# Altium PCB Final_PCBDesign_HY.PcbDoc (part 1 of 2)
Units mil, origin at the board's own origin, x right, y up, seen from the top; angles counter-clockwise.
Board outline 6000 x 4000 mil, 2 copper layers (Top Layer, Bottom Layer); 11 components, 10 nets, 55 pads, 2 vias.
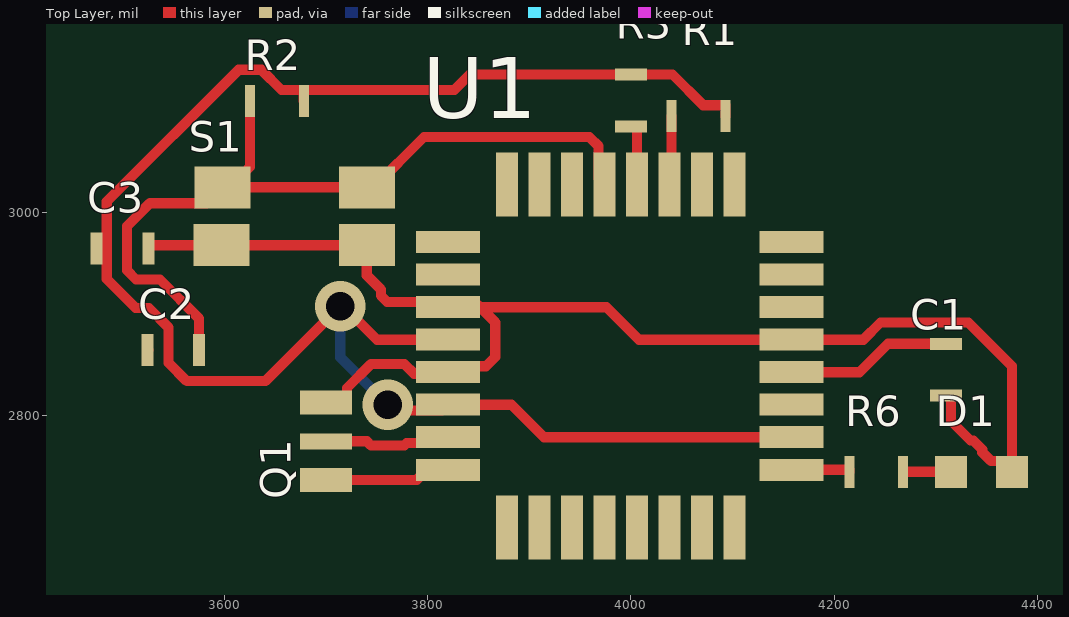
[diagram p0: Top Layer view]
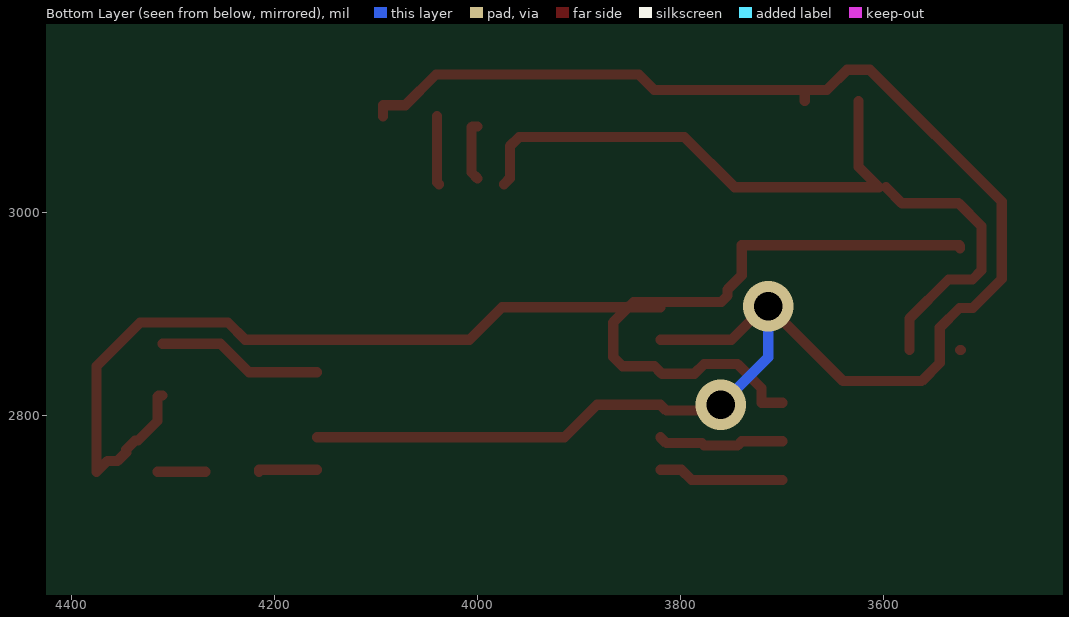
[diagram p1: Bottom Layer view, seen from below]

## Layer stack, top to bottom
Top Solder: solder mask 0.4, Solder Resist, Dk 3.5
Top Layer: signal copper 1.4
Dielectric 1: dielectric 12.6, FR-4, Dk 4.8
Bottom Layer: signal copper 1.4
Bottom Solder: solder mask 0.4, Solder Resist, Dk 3.5

## Board outline
1000,1000 7000,1000 7000,5000 1000,5000

## Design rules (kind name [scope] priority, off if disabled: settings)
Clearance [All] p1: gap=10 ignorepadtopadclearanceinfootprint=FALSE
PolygonConnect [All] p1: connectstyle=Relief reliefconductorwidth=10 reliefentries=4 polygonreliefangle="90 Angle" airgapwidth=10
RoutingVias [All] p1: holewidth=28 width=50 viastyle="Through Hole" minholewidth=28 minwidth=50 maxholewidth=28 maxwidth=50
SolderMaskExpansion [All] p1: expansion=4 istentingtop=FALSE
SupplyNets "Schematic Supply Nets_1" [InNet('GND')] p1: voltage=0.000
SupplyNets "Schematic Supply Nets" [InNet('VCC')] p2: voltage=0.000
Width [All] p1: maxlimit=10 minlimit=10 preferedwidth=10
30 further rules are at their usual default settings.

## Components (designator, comment, footprint, x,y, rotation, side; value= is the part's Value field where it differs from the comment)
C1 "0.1 uF" "C_0603 (1608 Metric)" 4347,2874 r90 top value=100nF
C2 "0.1 uF" "C_0603 (1608 Metric)" 3578,2828 r0 top value=100nF
C3 "0.1 uF" "C_0603 (1608 Metric)" 3528,2928 r0 top value=100nF
D1 "Yeşil LED" "D_0603 (1608 Metric)" 4359,2718 r0 top
Q1 "16MHZ" Q_3-SMD 3708,2837 r90 top value=15pF
R1 "10 kOhm" R_0603 4079,3097 r0 top value=10kΩ
R2 "10 kOhm" R_0603 3664,3112 r0 top value=10kΩ
R3 "4.7 kOhm" "0603 (1608 Metric)_2" 4003,3110 r90 top value=4.7kΩ
R6 "330 Ohm" "R_0603 (1608 Metric)" 4245,2747 r0 top value=47µF
S1 "SMD" EVQ-P7L01P 3644,2987 r0 top
U1 "ATMEGA328P-AU" U_32-TQFP 3958,2870 r0 top

## Footprints (in the part's own frame and the unit in brackets; to place one, negate y for a bottom-side part, rotate by r counter-clockwise, add the part's x,y. Pads: shape width x height; smd on the part's side, far side on the other; paste and mask are expansions set on the pad)
"0603 (1608 Metric)_2" [mm]
  rect 0.3x0.8 smd: 0(-0.635,0.076) 1(0.66,0.076)
"C_0603 (1608 Metric)" [mil]
  rect 11.81x31.5 smd: 0(-54,37) 1(-3,37)
"D_0603 (1608 Metric)" [mil]
  rect 31.5x31.5 smd: 0(-44,27) 1(16,27)
EVQ-P7L01P [mil]
  rect 55.12x41.34 smd: 0(-46,38) 1(96,38) 2(-47,-19) 3(96,-19)
Q_3-SMD [mm]
  rect 0.6x1.3 smd: 1(-2.54,0.203) 3(-0.61,0.203)
  rect 0.4x1.3 smd: 2(-1.575,0.203)
R_0603 [mil]
  rect 9.84x31.5 smd: 0(-39,-2) 1(14,-2)
"R_0603 (1608 Metric)" [mil]
  rect 9.84x31.5 smd: 0(-30,-2) 1(23,-2)
U_32-TQFP [mm]
  rect 1.6x0.55 smd: 1(-3.505,2.565) 2(-3.505,1.753) 3(-3.505,0.94) 4(-3.505,0.127) 5(-3.505,-0.686) 6(-3.505,-1.499) 7(-3.505,-2.311) 8(-3.505,-3.124) 17(5.08,-3.124) 18(5.08,-2.311) 19(5.08,-1.499) 20(5.08,-0.686) 21(5.08,0.127) 22(5.08,0.94) 23(5.08,1.753) 24(5.08,2.565)
  rect 0.55x1.6 smd: 9(-2.032,-4.572) 10(-1.219,-4.572) 11(-0.406,-4.572) 12(0.406,-4.572) 13(1.219,-4.572) 14(2.032,-4.572) 15(2.845,-4.572) 16(3.658,-4.572) 25(3.658,4.013) 26(2.845,4.013) 27(2.032,4.013) 28(1.219,4.013) 29(0.406,4.013) 30(-0.406,4.013) 31(-1.219,4.013) 32(-2.032,4.013)

## Part data
C1 C2 C3: library part CL10B104KB8NNNC, "Multi Layer Ceramic Capacitor (MLCC) / Cap Ceramic 0.1uF 50V X7R 10% Pad SMD 0603 125°C T/R", Case Code (Metric)=1608, Case Code (Imperial)=0603, Dielectric=X7R, Dielectric Material=Ceramic, Manufacturer="Samsung Electro-Mechanics", Max Operating Temperature=125°C, Min Operating Temperature=-55°C, Tolerance=10%, Voltage=50V, Case/Package=0603, Category="Ceramic Capacitors", China RoHS=Compliant, ComponentLink1Description=https://datasheet.octopart.com:443/CL10B104KB8NNNC-Samsung-datasheet-165517828.pdf?src-supplier=Upverter, ComponentLink1URL=https://datasheet.octopart.com:443/CL10B104KB8NNNC-Samsung-datasheet-165517828.pdf?src-supplier=Upverter, ComponentLink2Description=https://datasheet.octopart.com:443/CL10B104KB8NNNC-Samsung-Electro-Mechanics-datasheet-116890969.pdf?src-supplier=Upverter, ComponentLink2URL=https://datasheet.octopart.com:443/CL10B104KB8NNNC-Samsung-Electro-Mechanics-datasheet-116890969.pdf?src-supplier=Upverter, ComponentLink3Description=https://datasheet.octopart.com:443/CL10B104KB8NNNC-Samsung-Electro-Mechanics-datasheet-81461840.pdf?src-supplier=Upverter, ComponentLink3URL=https://datasheet.octopart.com:443/CL10B104KB8NNNC-Samsung-Electro-Mechanics-datasheet-81461840.pdf?src-supplier=Upverter, ComponentLink4Description=https://datasheet.octopart.com:443/CL10B104KB8NNNC-Samsung-Electro-Mechanics-datasheet-181551448.pdf?src-supplier=Newark, ComponentLink4URL=https://datasheet.octopart.com:443/CL10B104KB8NNNC-Samsung-Electro-Mechanics-datasheet-181551448.pdf?src-supplier=Newark, ComponentLink5Description=https://datasheet.octopart.com:443/CL10B104KB8NNNC-Samsung-Electro-Mechanics-datasheet-181551449.pdf?src-supplier=Newark, ComponentLink5URL=https://datasheet.octopart.com:443/CL10B104KB8NNNC-Samsung-Electro-Mechanics-datasheet-181551449.pdf?src-supplier=Newark, ComponentLink6Description=https://datasheet.octopart.com/CL10B104KB8NNNC-Samsung-Electro-Mechanics-datasheet-8324245.pdf, ComponentLink6URL=https://datasheet.octopart.com/CL10B104KB8NNNC-Samsung-Electro-Mechanics-datasheet-8324245.pdf, ComponentLink7Description=https://datasheet.octopart.com/CL10B104KB8NNNC-Samsung-Electro-Mechanics-datasheet-97040617.pdf, ComponentLink7URL=https://datasheet.octopart.com/CL10B104KB8NNNC-Samsung-Electro-Mechanics-datasheet-97040617.pdf, ComponentLink8Description=https://datasheet.octopart.com:443/CL10B104KB8NNNC-Samsung-Electro-Mechanics-datasheet-136482302.pdf?src-supplier=Samsung+SCT, ComponentLink8URL=https://datasheet.octopart.com:443/CL10B104KB8NNNC-Samsung-Electro-Mechanics-datasheet-136482302.pdf?src-supplier=Samsung+SCT, ComponentLink9Description=https://datasheet.octopart.com:443/CL10B104KB8NNNC-Samsung-datasheet-42770373.pdf?src-supplier=Future+Electronics, ComponentLink9URL=https://datasheet.octopart.com:443/CL10B104KB8NNNC-Samsung-datasheet-42770373.pdf?src-supplier=Future+Electronics, ComponentLink10Description=https://datasheet.octopart.com:443/CL10B104KB8NNNC-Samsung-datasheet-26589154.pdf?src-supplier=Future+Electronics, ComponentLink10URL=https://datasheet.octopart.com:443/CL10B104KB8NNNC-Samsung-datasheet-26589154.pdf?src-supplier=Future+Electronics, ComponentLink11Description=https://datasheet.octopart.com:443/CL10B104KB8NNNC-Samsung-Electro-Mechanics-datasheet-149136784.pdf?src-supplier=Future+Electronics, ComponentLink11URL=https://datasheet.octopart.com:443/CL10B104KB8NNNC-Samsung-Electro-Mechanics-datasheet-149136784.pdf?src-supplier=Future+Electronics, ComponentLink12Description=https://datasheet.octopart.com:443/CL10B104KB8NNNC-Samsung-datasheet-22147433.pdf?src-supplier=TME, ComponentLink12URL=https://datasheet.octopart.com:443/CL10B104KB8NNNC-Samsung-datasheet-22147433.pdf?src-supplier=TME, ComponentLink13Description=https://datasheet.octopart.com:443/CL10B104KB8NNNC-Samsung-Electro-Mechanics-datasheet-11837008.pdf?src-supplier=Arrow+Electronics, ComponentLink13URL=https://datasheet.octopart.com:443/CL10B104KB8NNNC-Samsung-Electro-Mechanics-datasheet-11837008.pdf?src-supplier=Arrow+Electronics, Contact Plating=Tin, Depth=800µm, Height=900µm, Lead Free="Lead Free", Length=1.6mm, Lifecycle Status=Production, Manufacturer Part Number=CL10B104KB8NNNC, Material=Ceramic, Mounting Technology="Surface Mount", Number of Terminals=2, Pricing="8000=0,0023, 20000=0,0022, 80000=0,0021, 200000=0,0021, 500000=0,002 (USD)", Radiation Hardening=No, REACH SVHC=Yes, RoHS=Compliant, Schedule B="8532240020, 8532240020|8532240020|8532240020|8532240020|8532240020|8532240020|8532240020|8532240020|8532240020|8532240020, 8532240020|8532240020|8532240020|8532240020|8532240020|8532240020|8532240020|8532240020|8532240020|8532240020|8532240020, 8532240020|8532240020|8532240020|8532240020|8532240020|8532240020|8532240020|8532240020|8532240020|8532240020|8532240020|8532240020", Stock=68984000, Supplier="Future Electronics", Supplier Part Number=CL10B104KB8NNNC, Thickness=889µm, Voltage Rating=50V, Voltage Rating (DC)=50V, Width=800µm
D1: library part LTST-C190KGKT, "LED yellow green 0603 wavelength 567.5nm~576.5nm light intensity 18mcd~71mcd Front Mounting", Case Code (Metric)=1608, Case Code (Imperial)=0603, Color=Green, Forward Current=30mA, Forward Voltage=2.4V, Lens Color="Clear, Colorless", Manufacturer="Diodes Inc.", Max Operating Temperature=85°C, Min Operating Temperature=-30°C, Power Dissipation=75mW, Reverse Voltage=5V, Test Current=20mA, Case/Package=0603, Category=LEDs, China RoHS=Compliant, ComponentLink1Description=https://datasheet.octopart.com:443/LTST-C190KGKT-Lite-On-datasheet-86397316.pdf?src-supplier=ODG+(Origin+Data+Global), ComponentLink1URL=https://datasheet.octopart.com:443/LTST-C190KGKT-Lite-On-datasheet-86397316.pdf?src-supplier=ODG+(Origin+Data+Global), ComponentLink2Description=https://datasheet.octopart.com:443/LTST-C190KGKT-Lite-On-datasheet-180605179.pdf?src-supplier=IHS, ComponentLink2URL=https://datasheet.octopart.com:443/LTST-C190KGKT-Lite-On-datasheet-180605179.pdf?src-supplier=IHS, ComponentLink3Description=https://datasheet.octopart.com:443/LTST-C190KGKT-Lite-On-datasheet-13693967.pdf?src-supplier=Factory+Futures, ComponentLink3URL=https://datasheet.octopart.com:443/LTST-C190KGKT-Lite-On-datasheet-13693967.pdf?src-supplier=Factory+Futures, ComponentLink4Description=https://datasheet.octopart.com:443/LTST-C190KGKT-Lite-On-datasheet-165573809.pdf?src-supplier=TME, ComponentLink4URL=https://datasheet.octopart.com:443/LTST-C190KGKT-Lite-On-datasheet-165573809.pdf?src-supplier=TME, ComponentLink5Description=https://datasheet.octopart.com:443/LTST-C190KGKT-Lite-On-datasheet-165573808.pdf?src-supplier=TME, ComponentLink5URL=https://datasheet.octopart.com:443/LTST-C190KGKT-Lite-On-datasheet-165573808.pdf?src-supplier=TME, ComponentLink6Description=https://datasheet.octopart.com:443/LTST-C190KGKT-Lite-On-datasheet-43775815.pdf?src-supplier=TME, ComponentLink6URL=https://datasheet.octopart.com:443/LTST-C190KGKT-Lite-On-datasheet-43775815.pdf?src-supplier=TME, ComponentLink7Description=https://datasheet.octopart.com:443/LTST-C190KGKT-Lite-On-datasheet-32046999.pdf?src-supplier=Future+Electronics, ComponentLink7URL=https://datasheet.octopart.com:443/LTST-C190KGKT-Lite-On-datasheet-32046999.pdf?src-supplier=Future+Electronics, ComponentLink8Description=https://datasheet.octopart.com:443/LTST-C190KGKT-Lite-On-datasheet-8326678.pdf?src-supplier=Future+Electronics, ComponentLink8URL=https://datasheet.octopart.com:443/LTST-C190KGKT-Lite-On-datasheet-8326678.pdf?src-supplier=Future+Electronics, ComponentLink9Description=https://datasheet.octopart.com:443/LTST-C190KGKT-Lite-On-datasheet-78838574.pdf?src-supplier=Future+Electronics, ComponentLink9URL=https://datasheet.octopart.com:443/LTST-C190KGKT-Lite-On-datasheet-78838574.pdf?src-supplier=Future+Electronics, ComponentLink10Description=https://datasheet.octopart.com:443/LTST-C190KGKT-Lite-On-datasheet-158288.pdf?src-supplier=Mouser, ComponentLink10URL=https://datasheet.octopart.com:443/LTST-C190KGKT-Lite-On-datasheet-158288.pdf?src-supplier=Mouser, ComponentLink11Description=https://datasheet.octopart.com:443/LTST-C190KGKT-Lite-On-datasheet-49281.pdf?src-supplier=DigiKey, ComponentLink11URL=https://datasheet.octopart.com:443/LTST-C190KGKT-Lite-On-datasheet-49281.pdf?src-supplier=DigiKey, ComponentLink12Description=https://datasheet.octopart.com:443/LTST-C190KGKT-Lite-On-datasheet-14174998.pdf?src-supplier=iiiC, ComponentLink12URL=https://datasheet.octopart.com:443/LTST-C190KGKT-Lite-On-datasheet-14174998.pdf?src-supplier=iiiC, Depth=800µm, Dominant Wavelength=571nm, Height=800µm, Lead Free="Lead Free", Length=1.6mm, Lens Style=Clear, Lens Transparency=Clear, Lifecycle Status=Production, Luminous Intensity=35mcd, Manufacturer Part Number=LTST-C190KGKT, Mounting Technology="Surface Mount", Number of Circuits=1, Number of Elements=1, Number of LEDs=1, Number of Terminals=2, Peak Wavelength=574nm, Pins=2, Power Rating=75mW, Pricing="4000=0,0157, 8000=0,0153, 12000=0,0151, 20000=0,0148, 28000=0,0146, 40000=0,0144 (USD)", Radiation Hardening=No, REACH SVHC=Yes, RoHS=Compliant, Schedule B="8541402000, 8541402000|8541402000|8541402000|8541402000|8541402000|8541402000|8541402000|8541402000|8541402000|8541402000|8541402000|8541402000|8541402000|8541402000|8541402000|8541402000|8541402000|8541402000|8541402000|8541402000|8541402000|8541402000|8541402000|85", Shape=Rectangular, Stock=508000, Supplier="Arrow Electronics", Supplier Part Number=LTST-C190KGKT, Terminal Pitch=1.5mm, Viewing Angle=130°, Wavelength=574nm, Width=800µm, Illumination Color=Green
Q1: library part CSTCE16M0V53-R0, "Ceramic Resonator 16MHz ±0.5% (Tol) ±0.3% (Stability) 15pF 40Ohm 3-Pin CSMD T/R", Case/Package=SMD/SMT, Frequency=16MHz, Frequency Stability=5000ppm, Frequency Tolerance=0.5%, Load Capacitance=15pF, Manufacturer=Murata, Max Operating Temperature=85°C, Min Operating Temperature=-45°C, Category=Capacitors, ComponentLink1Description=https://datasheet.octopart.com:443/CSTCE16M0V53-R0-Murata-datasheet-180807744.pdf?src-supplier=IHS, ComponentLink1URL=https://datasheet.octopart.com:443/CSTCE16M0V53-R0-Murata-datasheet-180807744.pdf?src-supplier=IHS, ComponentLink2Description=https://datasheet.octopart.com:443/CSTCE16M0V53-R0-Murata-datasheet-13544362.pdf?src-supplier=Upverter, ComponentLink2URL=https://datasheet.octopart.com:443/CSTCE16M0V53-R0-Murata-datasheet-13544362.pdf?src-supplier=Upverter, ComponentLink3Description=https://datasheet.octopart.com:443/CSTCE16M0V53-R0-Murata-datasheet-12524911.pdf?src-supplier=Upverter, ComponentLink3URL=https://datasheet.octopart.com:443/CSTCE16M0V53-R0-Murata-datasheet-12524911.pdf?src-supplier=Upverter, ComponentLink4Description=https://datasheet.octopart.com:443/CSTCE16M0V53-R0-Murata-datasheet-62316101.pdf?src-supplier=Upverter, ComponentLink4URL=https://datasheet.octopart.com:443/CSTCE16M0V53-R0-Murata-datasheet-62316101.pdf?src-supplier=Upverter, ComponentLink5Description=https://datasheet.octopart.com:443/CSTCE16M0V53-R0-Murata-datasheet-141913778.pdf?src-supplier=Upverter, ComponentLink5URL=https://datasheet.octopart.com:443/CSTCE16M0V53-R0-Murata-datasheet-141913778.pdf?src-supplier=Upverter, ComponentLink6Description=https://datasheet.octopart.com:443/CSTCE16M0V53-R0-Murata-datasheet-5335552.pdf?src-supplier=Newark, ComponentLink6URL=https://datasheet.octopart.com:443/CSTCE16M0V53-R0-Murata-datasheet-5335552.pdf?src-supplier=Newark, ComponentLink7Description=https://datasheet.octopart.com:443/CSTCE16M0V53-R0-Murata-datasheet-162930.pdf?src-supplier=Future+Electronics, ComponentLink7URL=https://datasheet.octopart.com:443/CSTCE16M0V53-R0-Murata-datasheet-162930.pdf?src-supplier=Future+Electronics, ComponentLink8Description=https://datasheet.octopart.com:443/CSTCE16M0V53-R0-Murata-datasheet-10541638.pdf?src-supplier=Future+Electronics, ComponentLink8URL=https://datasheet.octopart.com:443/CSTCE16M0V53-R0-Murata-datasheet-10541638.pdf?src-supplier=Future+Electronics, ComponentLink9Description=https://datasheet.octopart.com:443/CSTCE16M0V53-R0-Murata-datasheet-141258340.pdf?src-supplier=Ciiva, ComponentLink9URL=https://datasheet.octopart.com:443/CSTCE16M0V53-R0-Murata-datasheet-141258340.pdf?src-supplier=Ciiva, ComponentLink10Description=https://datasheet.octopart.com:443/CSTCE16M0V53-R0-Murata-datasheet-138707999.pdf?src-supplier=Ciiva, ComponentLink10URL=https://datasheet.octopart.com:443/CSTCE16M0V53-R0-Murata-datasheet-138707999.pdf?src-supplier=Ciiva, ComponentLink11Description=https://datasheet.octopart.com:443/CSTCE16M0V53-R0-Murata-datasheet-83054217.pdf?src-supplier=TME, ComponentLink11URL=https://datasheet.octopart.com:443/CSTCE16M0V53-R0-Murata-datasheet-83054217.pdf?src-supplier=TME, ComponentLink12Description=https://datasheet.octopart.com/CSTCE16M0V53-R0-Murata-datasheet-86813623.pdf, ComponentLink12URL=https://datasheet.octopart.com/CSTCE16M0V53-R0-Murata-datasheet-86813623.pdf, ComponentLink13Description=https://datasheet.octopart.com:443/CSTCE16M0V53-R0-Murata-datasheet-13536434.pdf?src-supplier=Factory+Futures, ComponentLink13URL=https://datasheet.octopart.com:443/CSTCE16M0V53-R0-Murata-datasheet-13536434.pdf?src-supplier=Factory+Futures, ComponentLink14Description=https://datasheet.octopart.com:443/CSTCE16M0V53-R0-Murata-datasheet-11793933.pdf?src-supplier=Arrow+Electronics, ComponentLink14URL=https://datasheet.octopart.com:443/CSTCE16M0V53-R0-Murata-datasheet-11793933.pdf?src-supplier=Arrow+Electronics, ComponentLink15Description=https://datasheet.octopart.com:443/CSTCE16M0V53-R0-Murata-datasheet-15574.pdf?src-supplier=element14+APAC, ComponentLink15URL=https://datasheet.octopart.com:443/CSTCE16M0V53-R0-Murata-datasheet-15574.pdf?src-supplier=element14+APAC, ComponentLink16Description=https://datasheet.octopart.com:443/CSTCE16M0V53-R0-Murata-datasheet-119166.pdf?src-supplier=DigiKey, ComponentLink16URL=https://datasheet.octopart.com:443/CSTCE16M0V53-R0-Murata-datasheet-119166.pdf?src-supplier=DigiKey, ComponentLink17Description=http://sigma.octopart.com:80/reach_statement/Murata-company-16.pdf?src-supplier=Compliance+Statements, ComponentLink17URL=http://sigma.octopart.com:80/reach_statement/Murata-company-16.pdf?src-supplier=Compliance+Statements, Composition=Ceramic, Contact Plating=Gold, Height=990.6µm, Lead Free="Lead Free", Length=3.2004mm, Lifecycle Status=Obsolete, Manufacturer Part Number=CSTCE16M0V53-R0, Pins=3, Pricing="5=0,458, 50=0,304, 250=0,277, 500=0,227, 1500=0,212, 3000=0,197, 15000=0,191 (EUR)", REACH SVHC=Yes, RoHS=Compliant, Self Resonant Frequency=16MHz, Supplier=Farnell, Supplier Part Number=CSTCE16M0V53-R0, Termination=SMD/SMT, Tolerance=0.5%, Width=1.2954mm, Impedance=40Ω
R1 R2: library part RC0603FR-0710KL, "100mW Thick Film Resistors ±100ppm/℃ ±1% 10kΩ 0603 Chip Resistor - Surface Mount ROHS", Case Code (Metric)=0603, Manufacturer="Yageo Group", Max Operating Temperature=155°C, Min Operating Temperature=-55°C, Power Rating=100mW, Temperature Coefficient=100ppm/°C, Tolerance=1%, Voltage Rating=75V, Voltage Rating (DC)=50V, Case Code (Imperial)=0603, Case/Package=0603, Category="Chip SMD Resistors", China RoHS=Non-Compliant, ComponentLink1Description=https://datasheet.octopart.com:443/RC0603FR-0710KL-Yageo-datasheet-175887523.pdf?src-supplier=IHS, ComponentLink1URL=https://datasheet.octopart.com:443/RC0603FR-0710KL-Yageo-datasheet-175887523.pdf?src-supplier=IHS, ComponentLink2Description=https://datasheet.octopart.com:443/RC0603FR-0710KL-Yageo-datasheet-103092701.pdf?src-supplier=Upverter, ComponentLink2URL=https://datasheet.octopart.com:443/RC0603FR-0710KL-Yageo-datasheet-103092701.pdf?src-supplier=Upverter, ComponentLink3Description=https://datasheet.octopart.com:443/RC0603FR-0710KL-Yageo-datasheet-98239111.pdf?src-supplier=Upverter, ComponentLink3URL=https://datasheet.octopart.com:443/RC0603FR-0710KL-Yageo-datasheet-98239111.pdf?src-supplier=Upverter, ComponentLink4Description=https://datasheet.octopart.com:443/RC0603FR-0710KL-Yageo-datasheet-141265859.pdf?src-supplier=Upverter, ComponentLink4URL=https://datasheet.octopart.com:443/RC0603FR-0710KL-Yageo-datasheet-141265859.pdf?src-supplier=Upverter, ComponentLink5Description=https://sigma.octopart.com:443/138820526/technical_drawing/Yageo-RC0603FR-0710KL.pdf?src-supplier=Upverter, ComponentLink5URL=https://sigma.octopart.com:443/138820526/technical_drawing/Yageo-RC0603FR-0710KL.pdf?src-supplier=Upverter, ComponentLink6Description=https://datasheet.octopart.com:443/RC0603FR-0710KL-Yageo-datasheet-8328172.pdf?src-supplier=Farnell, ComponentLink6URL=https://datasheet.octopart.com:443/RC0603FR-0710KL-Yageo-datasheet-8328172.pdf?src-supplier=Farnell, ComponentLink7Description=https://datasheet.octopart.com:443/RC0603FR-0710KL-Yageo-datasheet-13691069.pdf?src-supplier=Farnell, ComponentLink7URL=https://datasheet.octopart.com:443/RC0603FR-0710KL-Yageo-datasheet-13691069.pdf?src-supplier=Farnell, ComponentLink8Description=https://datasheet.octopart.com:443/RC0603FR-0710KL-Yageo-datasheet-62067350.pdf?src-supplier=element14+APAC, ComponentLink8URL=https://datasheet.octopart.com:443/RC0603FR-0710KL-Yageo-datasheet-62067350.pdf?src-supplier=element14+APAC, ComponentLink9Description=https://datasheet.octopart.com:443/RC0603FR-0710KL-Yageo-datasheet-17842380.pdf?src-supplier=element14+APAC, ComponentLink9URL=https://datasheet.octopart.com:443/RC0603FR-0710KL-Yageo-datasheet-17842380.pdf?src-supplier=element14+APAC, ComponentLink10Description=https://datasheet.octopart.com:443/RC0603FR-0710KL-Yageo-datasheet-15599030.pdf?src-supplier=Future+Electronics, ComponentLink10URL=https://datasheet.octopart.com:443/RC0603FR-0710KL-Yageo-datasheet-15599030.pdf?src-supplier=Future+Electronics, ComponentLink11Description=https://datasheet.octopart.com:443/RC0603FR-0710KL-Yageo-Group-datasheet-176638170.pdf?src-supplier=Future+Electronics, ComponentLink11URL=https://datasheet.octopart.com:443/RC0603FR-0710KL-Yageo-Group-datasheet-176638170.pdf?src-supplier=Future+Electronics, ComponentLink12Description=https://datasheet.octopart.com:443/RC0603FR-0710KL-Yageo-datasheet-164759695.pdf?src-supplier=Future+Electronics, ComponentLink12URL=https://datasheet.octopart.com:443/RC0603FR-0710KL-Yageo-datasheet-164759695.pdf?src-supplier=Future+Electronics, ComponentLink13Description=https://datasheet.octopart.com:443/RC0603FR-0710KL-Yageo-datasheet-127823281.pdf?src-supplier=Future+Electronics, ComponentLink13URL=https://datasheet.octopart.com:443/RC0603FR-0710KL-Yageo-datasheet-127823281.pdf?src-supplier=Future+Electronics, ComponentLink14Description=https://datasheet.octopart.com:443/RC0603FR-0710KL-Yageo-datasheet-137700087.pdf?src-supplier=Future+Electronics, ComponentLink14URL=https://datasheet.octopart.com:443/RC0603FR-0710KL-Yageo-datasheet-137700087.pdf?src-supplier=Future+Electronics, ComponentLink15Description=https://datasheet.octopart.com:443/RC0603FR-0710KL-Yageo-datasheet-27584510.pdf?src-supplier=Future+Electronics, ComponentLink15URL=https://datasheet.octopart.com:443/RC0603FR-0710KL-Yageo-datasheet-27584510.pdf?src-supplier=Future+Electronics, ComponentLink16Description=https://datasheet.octopart.com:443/RC0603FR-0710KL-Yageo-datasheet-8324193.pdf?src-supplier=Future+Electronics, ComponentLink16URL=https://datasheet.octopart.com:443/RC0603FR-0710KL-Yageo-datasheet-8324193.pdf?src-supplier=Future+Electronics, ComponentLink17Description=https://datasheet.octopart.com:443/RC0603FR-0710KL-Yageo-datasheet-12596169.pdf?src-supplier=Newark, ComponentLink17URL=https://datasheet.octopart.com:443/RC0603FR-0710KL-Yageo-datasheet-12596169.pdf?src-supplier=Newark, ComponentLink18Description=https://datasheet.octopart.com:443/RC0603FR-0710KL-Yageo-datasheet-503470.pdf?src-supplier=Newark, ComponentLink18URL=https://datasheet.octopart.com:443/RC0603FR-0710KL-Yageo-datasheet-503470.pdf?src-supplier=Newark, ComponentLink19Description=https://datasheet.octopart.com:443/RC0603FR-0710KL-Yageo-datasheet-34211833.pdf?src-supplier=Newark, ComponentLink19URL=https://datasheet.octopart.com:443/RC0603FR-0710KL-Yageo-datasheet-34211833.pdf?src-supplier=Newark, ComponentLink20Description=https://datasheet.octopart.com:443/RC0603FR-0710KL-Yageo-datasheet-79472498.pdf?src-supplier=Megastar, ComponentLink20URL=https://datasheet.octopart.com:443/RC0603FR-0710KL-Yageo-datasheet-79472498.pdf?src-supplier=Megastar, ComponentLink21Description=https://datasheet.octopart.com/RC0603FR-0710KL-Yageo-datasheet-73766026.pdf, ComponentLink21URL=https://datasheet.octopart.com/RC0603FR-0710KL-Yageo-datasheet-73766026.pdf, ComponentLink22Description=https://datasheet.octopart.com:443/RC0603FR-0710KL-Yageo-datasheet-118562.pdf?src-supplier=DigiKey, ComponentLink22URL=https://datasheet.octopart.com:443/RC0603FR-0710KL-Yageo-datasheet-118562.pdf?src-supplier=DigiKey, ComponentLink23Description=http://sigma.octopart.com:80/conflict_mineral_statement/Yageo-company-3.pdf?src-supplier=Compliance+Statements, ComponentLink23URL=http://sigma.octopart.com:80/conflict_mineral_statement/Yageo-company-3.pdf?src-supplier=Compliance+Statements, ComponentLink24Description=http://sigma.octopart.com:80/rohs_statement/Yageo-company-2.pdf?src-supplier=Compliance+Statements, ComponentLink24URL=http://sigma.octopart.com:80/rohs_statement/Yageo-company-2.pdf?src-supplier=Compliance+Statements, Composition="Thick Film", Contact Plating=Tin, Depth=800µm, Height=450µm, Lead Free="Lead Free", Lead Pitch=300µm, Length=1.6mm, Lifecycle Status=Production, Manufacturer Part Number=RC0603FR-0710KL, Military Standard=Not, Mounting Technology="Surface Mount", Number of Terminals=2, Packaging="Tape & Reel", Pins=2, Pricing="5000=0,0037 (EUR)", Radiation Hardening=No, REACH SVHC=Yes, RoHS=Compliant, Schedule B="8533210045, 8533210045|8533210045|8533210045|8533210045|8533210045|8533210045|8533210045|8533210045|8533210045|8533210045|8533210045|8533210045|8533210045|8533210045|8533210045|8533210045|8533210045|8533210045|8533210045|8533210045|8533210045|8533210045|8533210045|85", Stock=11228000, Supplier=Farnell, Supplier Part Number=RC0603FR-0710KL, Termination=SMD/SMT, Weight=2.012816mg, Width=800µm, Working Voltage=75V
R3: library part RC0603FR-074K7L, "Yageo RC0603FR-074K7L Resistor 0603 SMD 4.7k Ohm 1% 100mW Thick Film", Case Code (Imperial)=0603, Manufacturer="Yageo Group", Max Operating Temperature=155°C, Min Operating Temperature=-55°C, Power Rating=100mW, Temperature Coefficient=100ppm/°C, Tolerance=1%, Voltage Rating=75V, Voltage Rating (DC)=50V, Case/Package=0603, Category="Chip SMD Resistors", China RoHS=Non-Compliant, ComponentLink1Description=https://datasheet.octopart.com:443/RC0603FR-074K7L-Yageo-datasheet-175887523.pdf?src-supplier=IHS, ComponentLink1URL=https://datasheet.octopart.com:443/RC0603FR-074K7L-Yageo-datasheet-175887523.pdf?src-supplier=IHS, ComponentLink2Description=https://datasheet.octopart.com:443/RC0603FR-074K7L-Yageo-datasheet-103092701.pdf?src-supplier=Upverter, ComponentLink2URL=https://datasheet.octopart.com:443/RC0603FR-074K7L-Yageo-datasheet-103092701.pdf?src-supplier=Upverter, ComponentLink3Description=https://datasheet.octopart.com:443/RC0603FR-074K7L-Yageo-datasheet-8328172.pdf?src-supplier=Farnell, ComponentLink3URL=https://datasheet.octopart.com:443/RC0603FR-074K7L-Yageo-datasheet-8328172.pdf?src-supplier=Farnell, ComponentLink4Description=https://datasheet.octopart.com:443/RC0603FR-074K7L-Yageo-datasheet-13691069.pdf?src-supplier=Farnell, ComponentLink4URL=https://datasheet.octopart.com:443/RC0603FR-074K7L-Yageo-datasheet-13691069.pdf?src-supplier=Farnell, ComponentLink5Description=https://datasheet.octopart.com:443/RC0603FR-074K7L-Yageo-Group-datasheet-190305687.pdf?src-supplier=Future+Electronics, ComponentLink5URL=https://datasheet.octopart.com:443/RC0603FR-074K7L-Yageo-Group-datasheet-190305687.pdf?src-supplier=Future+Electronics, ComponentLink6Description=https://datasheet.octopart.com:443/RC0603FR-074K7L-Yageo-datasheet-164759695.pdf?src-supplier=Future+Electronics, ComponentLink6URL=https://datasheet.octopart.com:443/RC0603FR-074K7L-Yageo-datasheet-164759695.pdf?src-supplier=Future+Electronics, ComponentLink7Description=https://datasheet.octopart.com:443/RC0603FR-074K7L-Yageo-datasheet-137700087.pdf?src-supplier=Future+Electronics, ComponentLink7URL=https://datasheet.octopart.com:443/RC0603FR-074K7L-Yageo-datasheet-137700087.pdf?src-supplier=Future+Electronics, ComponentLink8Description=https://datasheet.octopart.com:443/RC0603FR074K7L-Yageo-datasheet-27584510.pdf?src-supplier=Future+Electronics, ComponentLink8URL=https://datasheet.octopart.com:443/RC0603FR074K7L-Yageo-datasheet-27584510.pdf?src-supplier=Future+Electronics, ComponentLink9Description=https://datasheet.octopart.com:443/RC0603FR-074K7L-Yageo-datasheet-15599030.pdf?src-supplier=Future+Electronics, ComponentLink9URL=https://datasheet.octopart.com:443/RC0603FR-074K7L-Yageo-datasheet-15599030.pdf?src-supplier=Future+Electronics, ComponentLink10Description=https://datasheet.octopart.com:443/RC0603FR-074K7L-Yageo-datasheet-175423674.pdf?src-supplier=Newark, ComponentLink10URL=https://datasheet.octopart.com:443/RC0603FR-074K7L-Yageo-datasheet-175423674.pdf?src-supplier=Newark, ComponentLink11Description=https://datasheet.octopart.com:443/RC0603FR-074K7L-Yageo-datasheet-12596169.pdf?src-supplier=Newark, ComponentLink11URL=https://datasheet.octopart.com:443/RC0603FR-074K7L-Yageo-datasheet-12596169.pdf?src-supplier=Newark, ComponentLink12Description=https://datasheet.octopart.com:443/RC0603FR-074K7L-Yageo-datasheet-503470.pdf?src-supplier=Newark, ComponentLink12URL=https://datasheet.octopart.com:443/RC0603FR-074K7L-Yageo-datasheet-503470.pdf?src-supplier=Newark, ComponentLink13Description=https://datasheet.octopart.com:443/RC0603FR-074K7L-Yageo-datasheet-34211833.pdf?src-supplier=element14+APAC, ComponentLink13URL=https://datasheet.octopart.com:443/RC0603FR-074K7L-Yageo-datasheet-34211833.pdf?src-supplier=element14+APAC, ComponentLink14Description=https://datasheet.octopart.com:443/RC0603FR-074K7L-Yageo-datasheet-62067350.pdf?src-supplier=element14+APAC, ComponentLink14URL=https://datasheet.octopart.com:443/RC0603FR-074K7L-Yageo-datasheet-62067350.pdf?src-supplier=element14+APAC, ComponentLink15Description=https://datasheet.octopart.com:443/RC0603FR-074K7L-Yageo-datasheet-17842380.pdf?src-supplier=element14+APAC, ComponentLink15URL=https://datasheet.octopart.com:443/RC0603FR-074K7L-Yageo-datasheet-17842380.pdf?src-supplier=element14+APAC, ComponentLink16Description=https://datasheet.octopart.com:443/RC0603FR-074K7L-Yageo-datasheet-79472498.pdf?src-supplier=Megastar, ComponentLink16URL=https://datasheet.octopart.com:443/RC0603FR-074K7L-Yageo-datasheet-79472498.pdf?src-supplier=Megastar, ComponentLink17Description=https://datasheet.octopart.com/RC0603FR-074K7L-Yageo-datasheet-73766026.pdf, ComponentLink17URL=https://datasheet.octopart.com/RC0603FR-074K7L-Yageo-datasheet-73766026.pdf, ComponentLink18Description=https://datasheet.octopart.com:443/RC0603FR-074K7L-Yageo-datasheet-118562.pdf?src-supplier=DigiKey, ComponentLink18URL=https://datasheet.octopart.com:443/RC0603FR-074K7L-Yageo-datasheet-118562.pdf?src-supplier=DigiKey, ComponentLink19Description=http://sigma.octopart.com:80/conflict_mineral_statement/Yageo-company-3.pdf?src-supplier=Compliance+Statements, ComponentLink19URL=http://sigma.octopart.com:80/conflict_mineral_statement/Yageo-company-3.pdf?src-supplier=Compliance+Statements, ComponentLink20Description=http://sigma.octopart.com:80/rohs_statement/Yageo-company-2.pdf?src-supplier=Compliance+Statements, ComponentLink20URL=http://sigma.octopart.com:80/rohs_statement/Yageo-company-2.pdf?src-supplier=Compliance+Statements, Composition="Thick Film", Contact Plating=Tin, Country of Origin="Mainland China, Taiwan", Depth=800µm, Export Control Classification Number (ECCN) Code=EAR99, Harmonized Tariff Schedule (HTS) Code=8533.21.00.30, Height=450µm, Lead Free="Lead Free", Lead Pitch=300µm, Length=1.6mm, Lifecycle Status=Production, Manufacturer Part Number=RC0603FR-074K7L, Military Standard=Not, Mounting Technology="Surface Mount", Number of Terminals=2, Packaging="Tape & Reel", Pins=2, Pricing="10=0,0058, 100=0,0052, 500=0,0047, 1000=0,0042, 2500=0,0036, 5000=0,0031 (EUR)", Radiation Hardening=No, REACH SVHC=Yes, RoHS=Compliant, Schedule B="8533210045, 8533210045|8533210045|8533210045|8533210045|8533210045|8533210045|8533210045|8533210045|8533210045|8533210045|8533210045|8533210045|8533210045|8533210045|8533210045|8533210045|8533210045|8533210045|8533210045|8533210045|8533210045|8533210045|8533210045|85", Stock=357436, Supplier=Farnell, Supplier Part Number=RC0603FR-074K7L, Termination=SMD/SMT, Width=800µm, Working Voltage=75V, Introduction Date=2004-09-22
R6: library part RC0603FR-07330RL, "100mW Thick Film Resistors 75V ±100ppm/℃ ±1% 330Ω 0603 Chip Resistor - Surface Mount ROHS", Case Code (Metric)=7343, Case Code (Imperial)=2917, Case/Package=0603, ESR (Equivalent Series Resistance)=800mΩ, Manufacturer="Yageo Group", Max Operating Temperature=155°C, Max Power Dissipation=100mW, Min Operating Temperature=-55°C, Temperature Coefficient=100ppm/°C, Tolerance=1%, Voltage Rating=16V, Voltage Rating (AC)=50V, Working Voltage=75V, Category="Chip SMD Resistors", China RoHS=Non-Compliant, ComponentLink1Description=https://datasheet.octopart.com:443/RC0603FR-07330RL-Yageo-datasheet-175887523.pdf?src-supplier=Newark, ComponentLink1URL=https://datasheet.octopart.com:443/RC0603FR-07330RL-Yageo-datasheet-175887523.pdf?src-supplier=Newark, ComponentLink2Description=https://datasheet.octopart.com:443/RC0603FR-07330RL-Yageo-datasheet-62067350.pdf?src-supplier=Newark, ComponentLink2URL=https://datasheet.octopart.com:443/RC0603FR-07330RL-Yageo-datasheet-62067350.pdf?src-supplier=Newark, ComponentLink3Description=https://datasheet.octopart.com:443/RC0603FR-07330RL-Yageo-datasheet-12596169.pdf?src-supplier=Newark, ComponentLink3URL=https://datasheet.octopart.com:443/RC0603FR-07330RL-Yageo-datasheet-12596169.pdf?src-supplier=Newark, ComponentLink4Description=https://datasheet.octopart.com:443/RC0603FR-07330RL-Yageo-datasheet-503470.pdf?src-supplier=Newark, ComponentLink4URL=https://datasheet.octopart.com:443/RC0603FR-07330RL-Yageo-datasheet-503470.pdf?src-supplier=Newark, ComponentLink5Description=https://datasheet.octopart.com:443/RC0603FR-07330RL-Yageo-datasheet-34211833.pdf?src-supplier=Newark, ComponentLink5URL=https://datasheet.octopart.com:443/RC0603FR-07330RL-Yageo-datasheet-34211833.pdf?src-supplier=Newark, ComponentLink6Description=https://datasheet.octopart.com:443/RC0603FR-07330RL-Yageo-datasheet-103092701.pdf?src-supplier=Upverter, ComponentLink6URL=https://datasheet.octopart.com:443/RC0603FR-07330RL-Yageo-datasheet-103092701.pdf?src-supplier=Upverter, ComponentLink7Description=https://datasheet.octopart.com:443/RC0603FR-07330RL-Yageo-datasheet-98239111.pdf?src-supplier=Upverter, ComponentLink7URL=https://datasheet.octopart.com:443/RC0603FR-07330RL-Yageo-datasheet-98239111.pdf?src-supplier=Upverter, ComponentLink8Description=https://datasheet.octopart.com:443/RC0603FR-07330RL-Yageo-datasheet-8328172.pdf?src-supplier=element14+APAC, ComponentLink8URL=https://datasheet.octopart.com:443/RC0603FR-07330RL-Yageo-datasheet-8328172.pdf?src-supplier=element14+APAC, ComponentLink9Description=https://datasheet.octopart.com:443/RC0603FR-07330RL-Yageo-Group-datasheet-190305687.pdf?src-supplier=Future+Electronics, ComponentLink9URL=https://datasheet.octopart.com:443/RC0603FR-07330RL-Yageo-Group-datasheet-190305687.pdf?src-supplier=Future+Electronics, ComponentLink10Description=https://datasheet.octopart.com:443/RC0603FR-07330RL-Yageo-datasheet-15599030.pdf?src-supplier=Future+Electronics, ComponentLink10URL=https://datasheet.octopart.com:443/RC0603FR-07330RL-Yageo-datasheet-15599030.pdf?src-supplier=Future+Electronics, ComponentLink11Description=https://datasheet.octopart.com:443/RC0603FR-07330RL-Yageo-datasheet-164759695.pdf?src-supplier=Future+Electronics, ComponentLink11URL=https://datasheet.octopart.com:443/RC0603FR-07330RL-Yageo-datasheet-164759695.pdf?src-supplier=Future+Electronics, ComponentLink12Description=https://datasheet.octopart.com:443/RC0603FR-07330RL-Yageo-datasheet-137700087.pdf?src-supplier=Future+Electronics, ComponentLink12URL=https://datasheet.octopart.com:443/RC0603FR-07330RL-Yageo-datasheet-137700087.pdf?src-supplier=Future+Electronics, ComponentLink13Description=https://datasheet.octopart.com:443/RC0603FR-07330RL-Yageo-datasheet-27584510.pdf?src-supplier=Future+Electronics, ComponentLink13URL=https://datasheet.octopart.com:443/RC0603FR-07330RL-Yageo-datasheet-27584510.pdf?src-supplier=Future+Electronics, ComponentLink14Description=https://datasheet.octopart.com:443/RC0603FR-07330RL-Yageo-datasheet-8324193.pdf?src-supplier=Future+Electronics, ComponentLink14URL=https://datasheet.octopart.com:443/RC0603FR-07330RL-Yageo-datasheet-8324193.pdf?src-supplier=Future+Electronics, ComponentLink15Description=https://datasheet.octopart.com:443/RC0603FR-07330RL-Yageo-datasheet-79472498.pdf?src-supplier=Megastar, ComponentLink15URL=https://datasheet.octopart.com:443/RC0603FR-07330RL-Yageo-datasheet-79472498.pdf?src-supplier=Megastar, ComponentLink16Description=https://datasheet.octopart.com/RC0603FR-07330RL-Yageo-datasheet-73766026.pdf, ComponentLink16URL=https://datasheet.octopart.com/RC0603FR-07330RL-Yageo-datasheet-73766026.pdf, ComponentLink17Description=https://datasheet.octopart.com:443/RC0603FR-07330RL-Yageo-datasheet-13691069.pdf?src-supplier=Farnell, ComponentLink17URL=https://datasheet.octopart.com:443/RC0603FR-07330RL-Yageo-datasheet-13691069.pdf?src-supplier=Farnell, ComponentLink18Description=https://datasheet.octopart.com:443/RC0603FR-07330RL-Yageo-datasheet-118562.pdf?src-supplier=DigiKey, ComponentLink18URL=https://datasheet.octopart.com:443/RC0603FR-07330RL-Yageo-datasheet-118562.pdf?src-supplier=DigiKey, ComponentLink19Description=http://sigma.octopart.com:80/conflict_mineral_statement/Yageo-company-3.pdf?src-supplier=Compliance+Statements, ComponentLink19URL=http://sigma.octopart.com:80/conflict_mineral_statement/Yageo-company-3.pdf?src-supplier=Compliance+Statements, ComponentLink20Description=http://sigma.octopart.com:80/rohs_statement/Yageo-company-2.pdf?src-supplier=Compliance+Statements, ComponentLink20URL=http://sigma.octopart.com:80/rohs_statement/Yageo-company-2.pdf?src-supplier=Compliance+Statements, Composition="Thick Film", Contact Plating=Tin, Depth=800µm, Features="Moisture Resistant", Height=450µm, Lead Free="Lead Free", Length=1.6mm, Lifecycle Status=Production, Manufacturer Part Number=RC0603FR-07330RL, Mounting Technology="Surface Mount", Number of Terminals=2, Number of Terminations=2, Packaging="Tape and Reel", Pins=2, Power Rating=100mW, Pricing="10=0,0061, 100=0,0052, 500=0,0049, 1000=0,0046, 2500=0,0036 (EUR)", Radiation Hardening=No, REACH SVHC=Yes, RoHS=Compliant, Schedule B="8533210045, 8533210045|8533210045, 8533210045|8533210045|8533210045, 8533210045|8533210045|8533210045|8533210045", Stock=455830, Supplier=Farnell, Supplier Part Number=RC0603FR-07330RL, Termination=SMD/SMT, Voltage Rating (DC)=16V, Width=800µm
S1: library part EVQP7L01P, "Switch Tactile N.O. SPST Rectangular Button Gull Wing 0.05A 12VDC 1.6N SMD T/R", Case/Package=SMD/SMT, Contact Current Rating=50mA, Contact Resistance=500mΩ, Manufacturer=Panasonic, Max Operating Temperature=70°C, Max Voltage Rating (DC)=12V, Min Operating Temperature=-20°C, Operating Force=1.6N, Insulation Resistance=100MΩ, Actuator Length=650µm, Category="Tactile Switches", ComponentLink1Description=https://datasheet.octopart.com:443/EVQP7L01P-Panasonic-datasheet-22087671.pdf?src-supplier=Electro+Sonic, ComponentLink1URL=https://datasheet.octopart.com:443/EVQP7L01P-Panasonic-datasheet-22087671.pdf?src-supplier=Electro+Sonic, ComponentLink2Description=https://datasheet.octopart.com:443/EVQP7L01P-Panasonic-datasheet-98950114.pdf?src-supplier=Master+Electronics, ComponentLink2URL=https://datasheet.octopart.com:443/EVQP7L01P-Panasonic-datasheet-98950114.pdf?src-supplier=Master+Electronics, ComponentLink3Description=https://datasheet.octopart.com:443/EVQ-P7L01P-Panasonic-datasheet-13271580.pdf?src-supplier=RS+(Formerly+Allied+Electronics), ComponentLink3URL=https://datasheet.octopart.com:443/EVQ-P7L01P-Panasonic-datasheet-13271580.pdf?src-supplier=RS+(Formerly+Allied+Electronics), ComponentLink4Description=https://datasheet.octopart.com:443/EVQ-P7L01P-Panasonic-datasheet-13280430.pdf?src-supplier=RS+(Formerly+Allied+Electronics), ComponentLink4URL=https://datasheet.octopart.com:443/EVQ-P7L01P-Panasonic-datasheet-13280430.pdf?src-supplier=RS+(Formerly+Allied+Electronics), Electrical Life=100kcycles, Height=1.35mm, Lead Free="Lead Free", Length=3.55mm, Life (Cycles)=100kcycles, Lifecycle Status=Production, Manufacturer Part Number=EVQP7L01P, Max Current Rating=50mA, Mechanical Life=100kcycles, Mounting Technology="Surface Mount", Number of Positions=1, Orientation="Right Angle", Pricing="10=0,223, 50=0,209, 100=0,187, 500=0,163 (EUR)", Radiation Hardening=No, REACH SVHC=Yes, RoHS=Compliant, Stock=3026, Supplier=Farnell, Supplier Part Number=EVQP7L01P, Switch Function=Off-Mom, Switch Travel=200µm, Termination="Gull Wing", Throw Configuration=SPST, Voltage Rating (DC)=12V, Illumination Type=Non-Illuminated
U1: "MICROCONTROLLER MCU, 8 BIT, ATMEGA, 20MH; 20MHZ, TQFP-32; Controller Family/Series: ATmega; CPU Speed: 20MHz;", Case/Package=TQFP, Clock Frequency=20MHz, Manufacturer=Microchip, Manufacturer Lifecycle Status=REL, Max Operating Temperature=85°C, Max Supply Voltage=5.5V, Min Operating Temperature=-55°C, Min Supply Voltage=1.8V, Category=Microcontrollers, ComponentLink1Description=https://datasheet.octopart.com:443/ATMEGA328P-AU-Microchip-datasheet-147334532.pdf?src-supplier=Microchip, ComponentLink1URL=https://datasheet.octopart.com:443/ATMEGA328P-AU-Microchip-datasheet-147334532.pdf?src-supplier=Microchip, ComponentLink2Description=https://datasheet.octopart.com:443/ATMEGA328P-AU-Microchip-datasheet-148646239.pdf?src-supplier=Microchip, ComponentLink2URL=https://datasheet.octopart.com:443/ATMEGA328P-AU-Microchip-datasheet-148646239.pdf?src-supplier=Microchip, ComponentLink3Description=https://datasheet.octopart.com:443/ATMEGA328P-AU-Microchip-datasheet-68295846.pdf?src-supplier=SHENGYU+ELECTRONICS, ComponentLink3URL=https://datasheet.octopart.com:443/ATMEGA328P-AU-Microchip-datasheet-68295846.pdf?src-supplier=SHENGYU+ELECTRONICS, ComponentLink4Description=https://datasheet.octopart.com:443/ATMEGA328P-AU-Microchip-datasheet-133520744.pdf?src-supplier=LKR, ComponentLink4URL=https://datasheet.octopart.com:443/ATMEGA328P-AU-Microchip-datasheet-133520744.pdf?src-supplier=LKR, ComponentLink5Description=https://datasheet.octopart.com:443/ATMEGA328P-AU-Microchip-datasheet-100453898.pdf?src-supplier=Upverter, ComponentLink5URL=https://datasheet.octopart.com:443/ATMEGA328P-AU-Microchip-datasheet-100453898.pdf?src-supplier=Upverter, ComponentLink6Description=https://sigma.octopart.com:443/138797047/technical_drawing/Microchip-ATMEGA328P-AU.pdf?src-supplier=Upverter, ComponentLink6URL=https://sigma.octopart.com:443/138797047/technical_drawing/Microchip-ATMEGA328P-AU.pdf?src-supplier=Upverter, ComponentLink7Description=https://datasheet.octopart.com:443/ATMEGA328P-AU-Microchip-datasheet-34147914.pdf?src-supplier=Upverter, ComponentLink7URL=https://datasheet.octopart.com:443/ATMEGA328P-AU-Microchip-datasheet-34147914.pdf?src-supplier=Upverter, ComponentLink8Description=https://datasheet.octopart.com:443/ATMEGA328P-AU-Atmel-datasheet-10629940.pdf?src-supplier=Upverter, ComponentLink8URL=https://datasheet.octopart.com:443/ATMEGA328P-AU-Atmel-datasheet-10629940.pdf?src-supplier=Upverter, ComponentLink9Description=https://datasheet.octopart.com:443/ATMEGA328P-AU-Microchip-datasheet-62316222.pdf?src-supplier=element14+APAC, ComponentLink9URL=https://datasheet.octopart.com:443/ATMEGA328P-AU-Microchip-datasheet-62316222.pdf?src-supplier=element14+APAC, ComponentLink10Description=https://datasheet.octopart.com:443/ATMEGA328P-AU-Microchip-datasheet-14421303.pdf?src-supplier=element14+APAC, ComponentLink10URL=https://datasheet.octopart.com:443/ATMEGA328P-AU-Microchip-datasheet-14421303.pdf?src-supplier=element14+APAC, ComponentLink11Description=https://datasheet.octopart.com:443/ATMEGA328P-AU-Microchip-datasheet-154741723.pdf?src-supplier=Electro+Sonic, ComponentLink11URL=https://datasheet.octopart.com:443/ATMEGA328P-AU-Microchip-datasheet-154741723.pdf?src-supplier=Electro+Sonic, ComponentLink12Description=https://datasheet.octopart.com:443/ATMEGA328P-AU-Atmel-datasheet-13381135.pdf?src-supplier=_legacy+Avnet, ComponentLink12URL=https://datasheet.octopart.com:443/ATMEGA328P-AU-Atmel-datasheet-13381135.pdf?src-supplier=_legacy+Avnet, ComponentLink13Description=https://datasheet.octopart.com:443/ATMEGA328P-AU-Atmel-datasheet-30457899.pdf?src-supplier=Seeed+Studio, ComponentLink13URL=https://datasheet.octopart.com:443/ATMEGA328P-AU-Atmel-datasheet-30457899.pdf?src-supplier=Seeed+Studio, ComponentLink14Description=https://datasheet.octopart.com:443/ATMEGA328P-AU-Atmel-datasheet-8733641.pdf?src-supplier=element14, ComponentLink14URL=https://datasheet.octopart.com:443/ATMEGA328P-AU-Atmel-datasheet-8733641.pdf?src-supplier=element14, ComponentLink15Description=https://datasheet.octopart.com:443/ATMEGA328P-AU-Atmel-datasheet-8700178.pdf?src-supplier=element14, ComponentLink15URL=https://datasheet.octopart.com:443/ATMEGA328P-AU-Atmel-datasheet-8700178.pdf?src-supplier=element14, ComponentLink16Description=https://datasheet.octopart.com:443/ATMEGA328P-AU-Atmel-datasheet-10389530.pdf?src-supplier=Newark, ComponentLink16URL=https://datasheet.octopart.com:443/ATMEGA328P-AU-Atmel-datasheet-10389530.pdf?src-supplier=Newark, ComponentLink17Description=https://datasheet.octopart.com:443/ATMEGA328P-AU-Microchip-datasheet-65729177.pdf?src-supplier=TME, ComponentLink17URL=https://datasheet.octopart.com:443/ATMEGA328P-AU-Microchip-datasheet-65729177.pdf?src-supplier=TME, ComponentLink18Description=https://datasheet.octopart.com:443/ATMEGA328P-AU-Microchip-datasheet-101746195.pdf?src-supplier=Future+Electronics, ComponentLink18URL=https://datasheet.octopart.com:443/ATMEGA328P-AU-Microchip-datasheet-101746195.pdf?src-supplier=Future+Electronics, ComponentLink19Description=http://sigma.octopart.com:80/188450247/materials_sheet/Microchip-ATMEGA328P-AU.pdf?src-supplier=Compliance+Statements, ComponentLink19URL=http://sigma.octopart.com:80/188450247/materials_sheet/Microchip-ATMEGA328P-AU.pdf?src-supplier=Compliance+Statements, ComponentLink20Description=http://sigma.octopart.com:80/rohs_statement/Microchip-company-71.pdf?src-supplier=Compliance+Statements, ComponentLink20URL=http://sigma.octopart.com:80/rohs_statement/Microchip-company-71.pdf?src-supplier=Compliance+Statements, ComponentLink21Description=http://sigma.octopart.com:80/reach_statement/Microchip-company-70.pdf?src-supplier=Compliance+Statements, ComponentLink21URL=http://sigma.octopart.com:80/reach_statement/Microchip-company-70.pdf?src-supplier=Compliance+Statements, ComponentLink22Description=http://sigma.octopart.com:80/conflict_mineral_statement/Microchip-company-69.pdf?src-supplier=Compliance+Statements, ComponentLink22URL=http://sigma.octopart.com:80/conflict_mineral_statement/Microchip-company-69.pdf?src-supplier=Compliance+Statements, ComponentLink23Description=http://sigma.octopart.com:80/conflict_mineral_statement/Microchip-company-68.pdf?src-supplier=Compliance+Statements, ComponentLink23URL=http://sigma.octopart.com:80/conflict_mineral_statement/Microchip-company-68.pdf?src-supplier=Compliance+Statements, ComponentLink24Description=http://sigma.octopart.com:80/reach_statement/Atmel-company-6.pdf?src-supplier=Compliance+Statements, ComponentLink24URL=http://sigma.octopart.com:80/reach_statement/Atmel-company-6.pdf?src-supplier=Compliance+Statements, ComponentLink25Description=http://sigma.octopart.com:80/rohs_statement/Atmel-company-5.pdf?src-supplier=Compliance+Statements, ComponentLink25URL=http://sigma.octopart.com:80/rohs_statement/Atmel-company-5.pdf?src-supplier=Compliance+Statements, ComponentLink26Description=http://sigma.octopart.com:80/rohs_statement/Atmel-company-4.pdf?src-supplier=Compliance+Statements, ComponentLink26URL=http://sigma.octopart.com:80/rohs_statement/Atmel-company-4.pdf?src-supplier=Compliance+Statements, Core Architecture=AVR, Country of Assembly=Thailand, Country of Fabrication="United States of America", Country of Origin=Thailand, Data Bus Width=8b, Export Control Classification Number (ECCN) Code=EAR99, Frequency=20MHz, Harmonized Tariff Schedule (HTS) Code=8542.31.0015, Height=1.2mm, HS Code=8542.31.0015, Lead Free="Lead Free", Length=7mm, Lifecycle Status=Production, Manufacturer Part Number=ATMEGA328P-AU, Memory Format=FLASH, Memory Size=32kB, Mounting Technology="Surface Mount", Number of A/D Converters=1, Number of ADC Channels=8, Number of Programmable I/O=23, Number of PWM Channels=6, Number of SPI Channels=1, Number of Timers/Counters=3, Number of UART Channels=1, Number of I2C Channels=1, Number of I/Os=23, Oscillator Type=Internal, Peripherals="Brown-out Detect/Reset, POR, PWM, WDT", Pins=32, Pricing="1=2,31, 25=2,12, 100=1,91, 250=1,87 (EUR)", Projected EOL Date=2039-11-04, Radiation Hardening=No, RAM Size=2kB, REACH SVHC=No, RoHS=Compliant, Schedule B="8542310000, 8542310000|8542310000|8542310000|8542310000|8542310000", Stock=115019, Supplier=Farnell, Supplier Part Number=ATMEGA328P-AU, Watchdog Timer=Yes, Width=7mm, Interface="2-Wire, I2C, SPI, UART, USART"

## Via types
v1: diameter 50, hole 28, Top Layer to Bottom Layer, 2 vias

## Nets (pads, with @x,y where several pads share a name; then routed paths per layer and width w, separated by ;. In a path a pad name is that pad's centre, name@x,y a point inside that pad or via, vN(x,y) a via of type N, cw(c..) or ccw(c..) an arc to the next point about the centre after c; other vN are vias at no path point)
GND: C1.0 C3.1 D1.1 Q1.3 S1.2 S1.3 U1.3 U1.5 U1.21 | length 1440.6